# Altium PCB Shels_System_Bmduino.PcbDoc
Units mm, origin at the board's own origin, x right, y up, seen from the top; angles counter-clockwise.
Board outline 65.2 x 65.33 mm, 2 copper layers (Top Layer, Bottom Layer); 42 components, 32 nets, 184 pads, 27 vias.
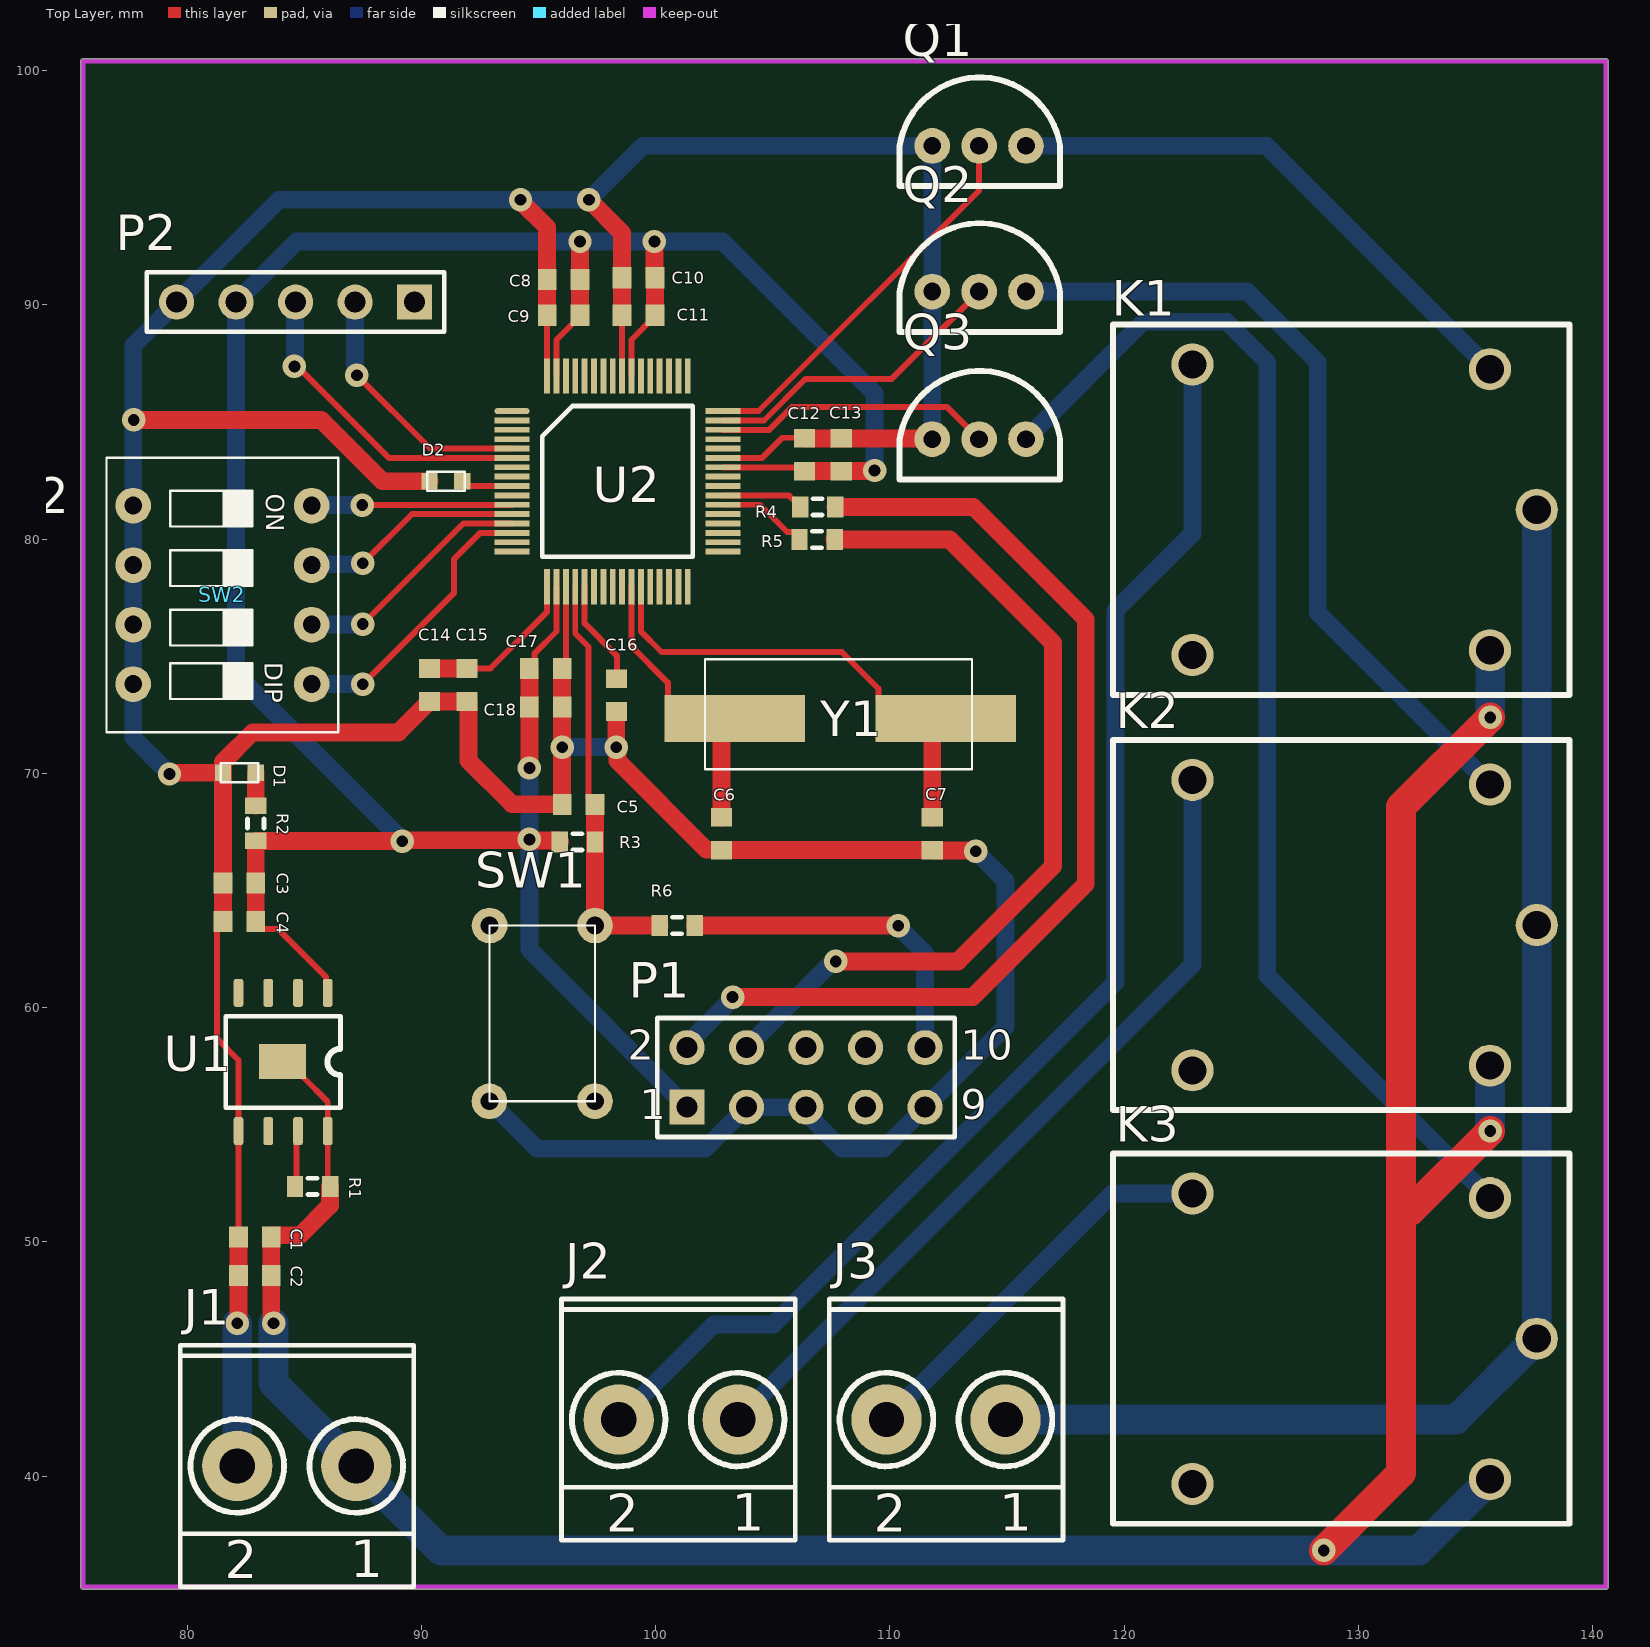
[diagram p0: Top Layer view]
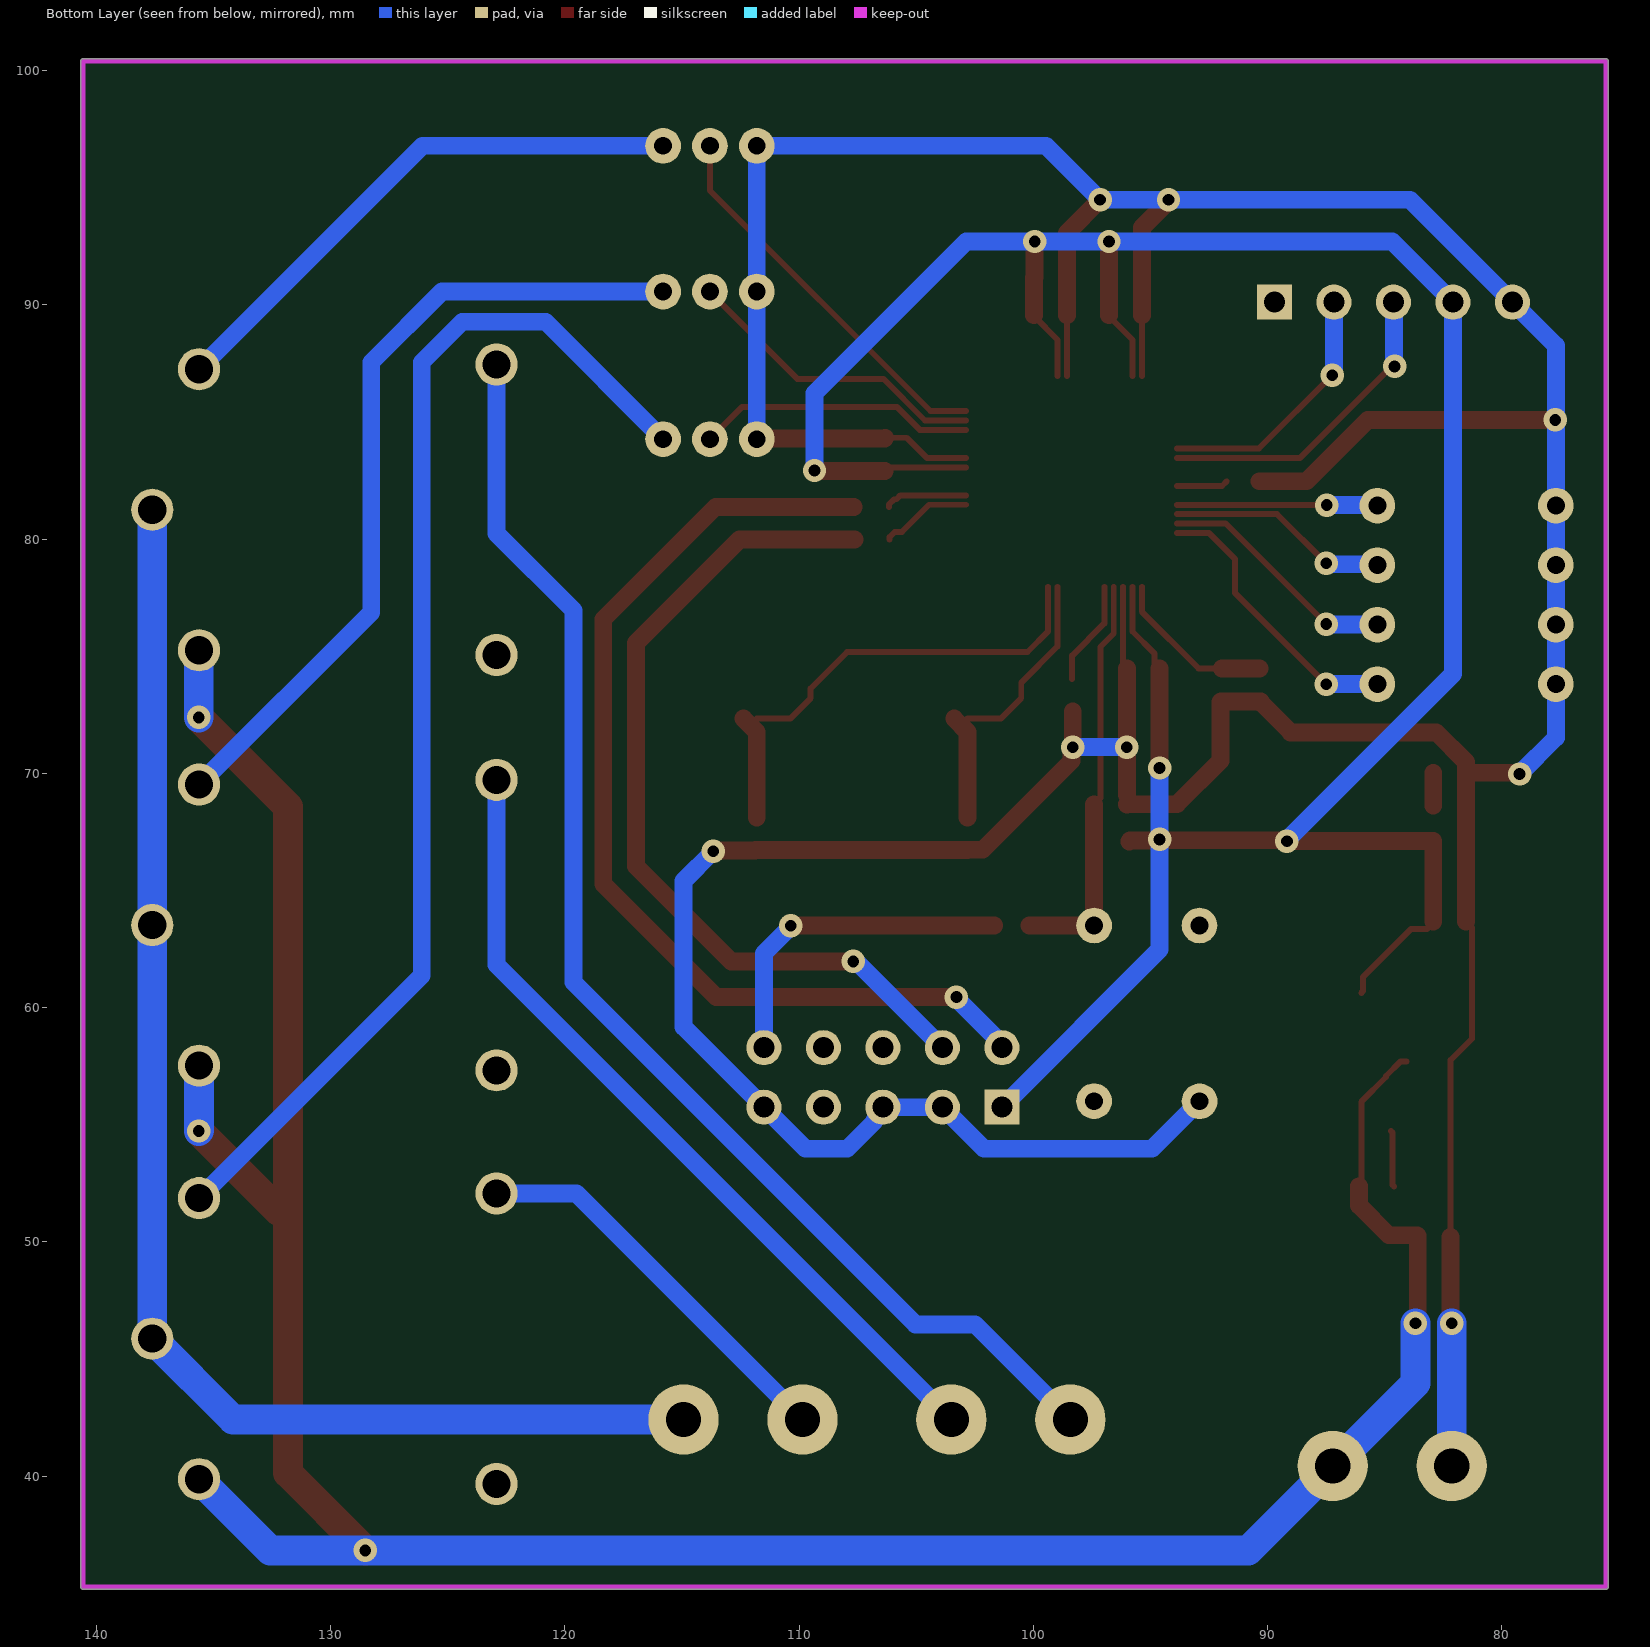
[diagram p1: Bottom Layer view, seen from below]

## Layer stack, top to bottom
Top Solder: solder mask 0.0102, Solder Resist, Dk 3.5
Top Layer: signal copper 0.0356
Dielectric 1: dielectric 0.32, FR-4, Dk 4.8
Bottom Layer: signal copper 0.0356
Bottom Solder: solder mask 0.0102, Solder Resist, Dk 3.5

## Board outline
75.465,35.278 75.465,98.424 75.465,100.405 cw(c75.565,100.405) 75.565,100.506 140.565,100.506 cw(c140.565,100.405) 140.665,100.405 140.665,97.132 140.665,35.278 cw(c140.565,35.278) 140.565,35.178 75.565,35.178 cw(c75.565,35.278)

## Design rules (kind name [scope] priority, off if disabled: settings)
Clearance [All] p1: gap=0.102 ignorepadtopadclearanceinfootprint=FALSE
PolygonConnect [All] p1: connectstyle=Relief reliefconductorwidth=0.254 reliefentries=4 polygonreliefangle="90 Angle" airgapwidth=0.254
RoutingVias [All] p1: holewidth=0.5 width=1 viastyle="Through Hole" minholewidth=0.5 minwidth=1 maxholewidth=0.5 maxwidth=1
SolderMaskExpansion [All] p1: expansion=0.102 istentingtop=FALSE
Width [All] p1: maxlimit=1.524 minlimit=0.178 preferedwidth=0.254 minimp=50.000000 maximp=50.000000 favimp=50.000000
30 further rules are at their usual default settings.

## Components (designator, comment, footprint, x,y, rotation, side; value= is the part's Value field where it differs from the comment)
C1 "Cap Semi" 1608[0603] 82.894,50.216 r0 top value=0.1uF
C2 "Cap Semi" 1608[0603] 82.894,48.565 r0 top value=10uF
C3 "Cap Semi" 1608[0603] 82.234,65.329 r0 top value=0.1uF
C4 "Cap Semi" 1608[0603] 82.234,63.678 r0 top value=10uF
C5 "Cap Semi" 1608[0603] 96.712,68.682 r0 top value=0.01uF
C6 "Cap Semi" 1608[0603] 102.811,67.426 r270 top value=12pF
C7 "Cap Semi" 1608[0603] 111.811,67.426 r90 top value=12pF
C8 "Cap Semi" 1608[0603] 96.071,91.084 r180 top value=2.2uF
C9 "Cap Semi" 1608[0603] 96.071,89.56 r0 top value=0.1uF
C10 "Cap Semi" 1608[0603] 99.271,91.161 r180 top value=2.2uF
C11 "Cap Semi" 1608[0603] 99.271,89.56 r0 top value=0.1uF
C12 "Cap Semi" 1608[0603] 106.35,83.606 r90 top value=2.2uF
C13 "Cap Semi" 1608[0603] 107.925,83.606 r270 top value=0.1uF
C14 "Cap Semi" 1608[0603] 90.348,73.776 r270 top value=2.2uF
C15 "Cap Semi" 1608[0603] 91.948,73.776 r90 top value=0.1uF
C16 "Cap Semi" 1608[0603] 98.323,73.341 r90 top value=0.1uF
C17 "Cap Semi" 1608[0603] 95.312,74.476 r0 top value=2.2uF
C18 "Cap Semi" 1608[0603] 95.312,72.844 r180 top value=0.1uF
D1 "green_light" LED_Green 82.934,70.028 r180 top
D2 "green_light" LED_Green 91.748,82.474 r180 top
J1 "Terminal_Block" "terminal block" 82.144,40.437 r270 top
J2 "Terminal_Block" "terminal block" 98.425,42.418 r270 top
J3 "Terminal_Block" "terminal block" 109.855,42.418 r270 top
K1 "Relay" Relay 128.829,80.952 r180 top
K2 "Relay" Relay 128.829,63.221 r180 top
K3 "Relay" Relay 128.829,45.565 r180 top
P1 "SW-DP" HDR2X5 101.346,55.753 r0 top
P2 "Wi-Fi_USART1" HDR1X5 89.713,90.119 r180 top
Q1 "S9013" S9013 113.814,96.792 r270 top
Q2 "S9013" S9013 113.814,90.569 r270 top
Q3 "S9013" S9013 113.814,84.268 r270 top
R1 "Res3" J1-0603 85.356,52.375 r180 top value=100
R2 "Res3" J1-0603 82.931,67.869 r90 top value=100
R3 "Res3" J1-0603 96.662,67.081 r0 top value=100
R4 "Res3" J1-0603 106.921,81.382 r180 top value=100
R5 "Res3" J1-0603 106.894,79.985 r180 top value=100
R6 "Res3" J1-0603 100.921,63.507 r180 top value=100
SW1 "BUTTON_DIP_4PIN" Push_Button 92.912,63.507 r270 top
SW2 "DIP_4_Switch" D_Switch_4 77.699,81.432 r270 top
U1 "HT7333-7" HT7333 86.549,59.633 r180 top
U2 "HT32F52367" HT32H52367 93.871,85.47 r0 top
Y1 "SMD_8MHz" Quartz-Crystal-8MHz 103.632,72.339 r0 top

## Footprints (in the part's own frame and the unit in brackets; to place one, negate y for a bottom-side part, rotate by r counter-clockwise, add the part's x,y. Pads: shape width x height; smd on the part's side, far side on the other; paste and mask are expansions set on the pad)
1608[0603] [mm] "Chip Capacitor, Body 1.6x0.8mm, IPC High Density"
  rect 0.8x0.9 smd: 1(-0.7,0) 2(0.7,0)
  body extent -0.87,-0.48 0.87,0.48, height 1.3
D_Switch_4 [mil] "DIP_Switch_4"
  round 60 hole 30: 1(0,300) 2(100,300) 3(200,300) 4(300,300) 5(0,0) 6(100,0) 7(200,0) 8(300,0)
  silkscreen extent -81,-45 381,345
HDR1X5 [mm] "Connector; Header; 5 Position"
  rect 1.5x1.5 hole 0.9: 1(0,0)
  round 1.5 hole 0.9: 2(2.54,0) 3(5.08,0) 4(7.62,0) 5(10.16,0)
  silkscreen extent -1.27,-1.27 11.43,1.27
HDR2X5 [mm] "Connector; Header; 5x2 Position"
  rect 1.5x1.5 hole 0.9: 1(0,0)
  round 1.5 hole 0.9: 2(0,2.54) 3(2.54,0) 4(2.54,2.54) 5(5.08,0) 6(5.08,2.54) 7(7.62,0) 8(7.62,2.54) 9(10.16,0) 10(10.16,2.54)
  silkscreen extent -1.27,-1.27 11.43,3.81
HT32H52367 [mm] "HT32H52367"
  oval 1.5x0.25 smd: 1(0,0)
  rect 1.5x0.25 smd: 2(0,-0.4) 3(0,-0.8) 4(0,-1.2) 5(0,-1.6) 6(0,-2) 7(0,-2.4) 8(0,-2.8) 9(0,-3.2) 10(0,-3.6) 11(0,-4) 12(0,-4.4) 13(0,-4.8) 14(0,-5.2) 15(0,-5.6) 16(0,-6) 33(9,-6) 34(9,-5.6) 35(9,-5.2) 36(9,-4.8) 37(9,-4.4) 38(9,-4) 39(9,-3.6) 40(9,-3.2) 41(9,-2.8) 42(9,-2.4) 43(9,-2) 44(9,-1.6) 45(9,-1.2) 46(9,-0.8) 47(9,-0.4) 48(9,0)
  rect 0.25x1.5 smd: 17(1.5,-7.5) 18(1.9,-7.5) 19(2.3,-7.5) 20(2.7,-7.5) 21(3.1,-7.5) 22(3.5,-7.5) 23(3.9,-7.5) 24(4.3,-7.5) 25(4.7,-7.5) 26(5.1,-7.5) 27(5.5,-7.5) 28(5.9,-7.5) 29(6.3,-7.5) 30(6.7,-7.5) 31(7.1,-7.5) 32(7.5,-7.5) 49(7.5,1.5) 50(7.1,1.5) 51(6.7,1.5) 52(6.3,1.5) 53(5.9,1.5) 54(5.5,1.5) 55(5.1,1.5) 56(4.7,1.5) 57(4.3,1.5) 58(3.9,1.5) 59(3.5,1.5) 60(3.1,1.5) 61(2.7,1.5) 62(2.3,1.5) 63(1.9,1.5) 64(1.5,1.5)
  silkscreen extent 1.28,-6.21 7.71,0.22
HT7333 [mm] "HT7333-7"
  rrect50% 0.41x1.2 smd: 1(0.545,-1) 2(1.815,-1) 3(3.085,-1) 4(4.355,-1) 5(4.355,4.902) 6(3.085,4.902) 7(1.815,4.902) 8(0.545,4.902)
  rect 2x1.5 smd: 9(2.475,1.925)
  silkscreen extent 0,0 4.9,3.9
J1-0603 [mm] "Chip Resistor, Body 1.6x0.8mm, IPC High Density"
  rect 0.7x0.9 smd: 1(-0.75,0) 2(0.75,0)
  silkscreen extent -0.2,-0.35 0.2,0.35, body extent -0.85,-0.48 0.85,0.48, height 0.9
LED_Green [mm] "LED_0603"
  rect 0.7x0.7 smd: 1(0,0) 2(1.4,0)
  silkscreen extent -0.1,-0.4 1.5,0.4
Push_Button [mil] "6*6"
  round 60 hole 30: 1(0,177.17) 2(0,0) 3(295.28,177.17) 4(295.37,-0.17)
  silkscreen extent 0,0 295,177
Quartz-Crystal-8MHz [mm] "Quartz-Crystal-8MHz"
  rect 6x2 smd: 1(-0.25,0) 2(8.75,0)
  silkscreen extent -1.52,-2.16 9.88,2.54
Relay [mm] "SRD05VDCSLC"
  round 1.8 hole 1.2: 0(-6.788,5.695) 1(-8.788,-0.305) 2(-6.788,-6.305) 3(5.912,5.895) 4(5.912,-6.505)
  silkscreen extent -10.19,-8.2 9.31,7.6
S9013 [mil] "S9013_TO-92"
  round 60 hole 30: 0(-0.08,-78.87) 1(-0.08,-0.13) 2(-0.08,78.61)
  silkscreen extent -115,-134 68,136
"terminal block" [mm]
  round 3 hole 1.5 paste+0 mask+0.051: 1(0,5.08) 2(0,0)
  silkscreen extent -5.15,-2.44 5.15,7.54

## Part data
C1 C2 C3 C4 C5 C6 C7 C8 C9 C10 C11 C12 C13 C14 C15 C16 C17 C18: "Capacitor (Semiconductor SIM Model)", LatestRevisionDate=29-May-2009, LatestRevisionNote="IPC-7351 Footprint Added.", PackageDescription="Chip Capacitor", PackageReference=C1206, Published=8-Jun-2000, Publisher="Altium Limited"
D1 D2: library part LED_Green
J1 J2 J3: library part "Terminal Block"
P1: library part "Header 5X2", "Header, 5-Pin, Dual row", LatestRevisionDate=17-Jul-2002, LatestRevisionNote="Re-released for DXP Platform.", Publisher="Altium Limited"
P2: library part "Header 5", "Header, 5-Pin", LatestRevisionDate=17-Jul-2002, LatestRevisionNote="Re-released for DXP Platform.", Publisher="Altium Limited"
R1 R2 R3 R4 R5 R6: "Resistor", LatestRevisionDate=29-May-2009, LatestRevisionNote="IPC-7351 Footprint Added.", PackageDescription="Chip Resistor", PackageReference=J1-0603, Published=8-Jun-2000, Publisher="Altium Limited"
SW1: library part Push_Button
SW2: library part Switch_D_4
U1: library part HT7333
Y1: library part Quartz_Crystal_8MHz

## Via types
v1: diameter 1, hole 0.5, Top Layer to Bottom Layer, 27 vias

## Nets (pads, with @x,y where several pads share a name; then routed paths per layer and width w, separated by ;. In a path a pad name is that pad's centre, name@x,y a point inside that pad or via, vN(x,y) a via of type N, cw(c..) or ccw(c..) an arc to the next point about the centre after c; other vN are vias at no path point)
3.3V: C3.2 C4.2 C8.1 C9.2 C10.1 C11.2 C12.1 C13.2 C17.1 C18.2 P1.1 P2.4 R2.1 R3.1 U1.1 U2.18 U2.42 U2.55 U2.63 | length 125.8
  Top Layer w0.254: C4.2 82.934,63.628 83.207,63.355 83.889,63.355 85.926,61.317 85.926,60.711 U1.1 ; C17.1 94.84,74.704 94.84,75.129 95.771,76.061 U2.18 ; U2.63 95.771,88.51 96.771,89.51 C9.2 ; U2.55 98.971,88.51 99.971,89.51 C11.2 ; U2.42 106.186,83.07 C12.1
  Top Layer w0.762: C4.2 C3.2 82.932,65.33 82.932,67.117 R2.1 89.179,67.119 89.205,67.145 94.577,67.145 v1(94.615,67.183) 94.661,67.137 95.881,67.137 95.912,67.106 R3.1 ; C17.1 C18.2 94.614,72.843 94.614,70.232 v1(94.615,70.231) ; C9.2 C8.1 96.773,91.086 96.773,92.709 v1(96.774,92.71) ; v1(99.949,92.71) 99.96,92.699 99.96,91.172 C10.1 C11.2 ; C12.1 C13.2 107.937,82.918 109.334,82.918 v1(109.347,82.931)
  Bottom Layer w0.762: v1(89.179,67.107) 89.179,67.158 82.093,74.244 P2.4 84.684,92.71 v1(99.949,92.71) 102.87,92.71 109.347,86.233 v1(109.347,82.931) ; v1(94.615,70.231) v1(94.615,67.183) 94.615,62.484 P1.1
5V: C1.2 C2.2 J1.1 K1.0 K2.0 K3.0 R1.1 U1.8 U1.9 | length 122.1
  Top Layer w0.254: U1.9 84.324,57.709 84.947,57.086 84.947,57.039 86.004,55.982 U1.8 86.004,52.476 R1.1
  Top Layer w0.762: v1(83.693,46.533) 83.693,46.597 83.594,46.696 C2.2 83.594,50.266 83.613,50.285 84.829,50.285 86.106,51.562 R1.1
  Top Layer w1.27: v1(128.524,36.83) 131.826,40.132 131.826,51.308 ; v1(135.636,54.737) 132.207,51.308 131.826,51.308 ; v1(135.636,72.39) 131.826,68.58 131.826,51.308
  Bottom Layer w1.27: v1(83.693,46.533) 83.693,43.967 90.83,36.83 v1(128.524,36.83) 132.577,36.83 K3.0 ; K2.0 135.617,54.756 v1(135.636,54.737) ; K1.0 135.636,75.238 v1(135.636,72.39)
24V: J3.1 K1.1 K2.1 K3.1 | length 59.5
  Bottom Layer w1.27: J3.1 134.165,42.418 K3.1 K2.1 K1.1
C1: K1.2 Q1.2 | length 23.8
  Bottom Layer w0.762: Q1.2 126.08,96.794 K1.2
C2: K2.2 Q2.2 | length 34.8
  Bottom Layer w0.762: Q2.2 125.253,90.571 128.27,87.554 128.27,76.873 K2.2
C3: K3.2 Q3.2 | length 52.7
  Bottom Layer w0.762: Q3.2 120.822,89.281 124.384,89.281 126.111,87.554 126.111,61.376 K3.2
CLDO: C14.1 C15.2 U2.17 | length 7.1
  Top Layer w0.254: C15.2 91.953,74.481 92.947,74.481 95.371,76.905 U2.17
  Top Layer w0.762: C14.1 C15.2
GND: C1.1 C2.1 C3.1 C4.1 C5.1 C6.2 C7.1 C8.2 C9.1 C10.2 C11.1 C12.2 C13.1 C14.2 C15.1 C16.1 C17.2 C18.1 D1.2 D2.2 J1.2 P1.3 P1.5 P1.9 P2.5 Q1.0 Q2.0 Q3.0 SW1.4 SW2.5 SW2.6 SW2.7 SW2.8 U1.5 U2.19 U2.43 U2.56 U2.64 | length 225.1
  Top Layer w0.254: C4.1 81.28,63.424 81.28,58.674 82.194,57.76 U1.5 C1.1 ; U2.64 C9.1 ; C17.2 96.171,74.635 U2.19 ; U2.56 C11.1 ; U2.43 104.552,83.47 105.413,84.331 C12.2@106.324,84.331
  Top Layer w0.762: v1(77.724,85.09) 85.725,85.09 88.341,82.474 D2.2 ; v1(79.248,69.977) 79.312,69.977 79.363,70.028 D1.2 ; C4.1 C3.1 D1.2 ; v1(82.144,46.533) 82.144,46.597 82.194,46.648 C1.1 ; v1(94.234,94.488) 94.234,94.438 95.371,93.301 C8.2 C9.1 ; C5.1 96.011,68.683 93.877,68.683 92.017,70.543 92.017,73.057 91.998,73.076 C15.1 90.298,73.076 90.279,73.057 90.279,73.014 89.02,71.755 82.804,71.755 81.534,70.485 D1.2 ; C5.1@96.012,69.081 v1(96.012,71.12) C18.1 C17.2 ; v1(97.155,94.488) 98.571,93.072 C10.2 C11.1 ; C16.1 v1(98.323,71.12) 98.369,71.074 98.369,70.541 102.165,66.745 102.792,66.745 C6.2 111.861,66.726 111.88,66.707 113.633,66.707 v1(113.665,66.675) ; C12.2@106.324,84.331 C12.2 Q3.0@111.775,84.306
  Bottom Layer w0.762: v1(79.248,69.977) 77.699,71.526 SW2.8 SW2.7 SW2.6 SW2.5 77.699,88.265 P2.5 83.922,94.488 v1(94.234,94.488) v1(97.155,94.488) 99.461,96.794 Q1.0 Q2.0 Q3.0 ; J1.2 J1.2@82.169,40.411 ; SW1.4 94.937,53.975 102.108,53.975 P1.3 P1.5 ; v1(96.012,71.12) 96.025,71.133 98.336,71.133 v1@98.349,71.145 ; P1.5@106.626,55.753 P1.5 ; v1(113.665,66.675) 114.935,65.405 114.935,59.182 P1.9 109.728,53.975 107.95,53.975 106.795,55.13 106.795,55.184 106.426,55.553 P1.5
  Bottom Layer w1.27: J1.2 v1(82.144,46.533)
GPIO_DIP1_PC4: SW2.1 U2.11 | length 8.6
  Top Layer w0.254: v1(87.478,81.458) 87.487,81.468 93.869,81.468 U2.11
  Bottom Layer w0.254: SW2.1 SW2.1@85.344,81.458
  Bottom Layer w0.762: SW2.1@85.344,81.458 v1(87.478,81.458)
GPIO_DIP2_PC5: SW2.2 U2.12 | length 9.5
  Top Layer w0.254: v1(87.503,78.969) 89.604,81.07 U2.12
  Bottom Layer w0.254: SW2.2 SW2.2@85.357,78.93 ; v1@87.465,78.93 v1(87.503,78.969)
  Bottom Layer w0.762: SW2.2@85.357,78.93 v1@87.465,78.93
GPIO_DIP3_PC8: SW2.3 U2.13 | length 10.3
  Top Layer w0.254: v1(87.503,76.378) 91.795,80.67 U2.13
  Bottom Layer w0.254: SW2.3 SW2.3@85.331,76.365 ; v1@87.49,76.365 v1(87.503,76.378)
  Bottom Layer w0.762: SW2.3@85.331,76.365 v1@87.49,76.365
GPIO_DIP4_PC9: SW2.4 U2.14 | length 12.1
  Top Layer w0.254: v1(87.503,73.812) 91.389,77.699 91.389,79.146 92.51,80.268 93.869,80.268 U2.14
  Bottom Layer w0.762: SW2.4 v1(87.503,73.812)
GPIO_GreenLED_PD1: Q3.1 U2.46 | length 11.9
  Top Layer w0.254: U2.46 104.852,84.67 105.832,85.649 112.432,85.649 Q3.1
GPIO_LED_PD4: D2.1 U2.9 | length 2.2
  Top Layer w0.254: D2.1 91.95,82.272 93.869,82.272 U2.9
GPIO_RedLED_PD3: Q1.1 U2.48 | length 16.7
  Top Layer w0.254: U2.48 104.393,85.47 113.811,94.888 Q1.1
GPIO_YellowLED_PD2: Q2.1 U2.47 | length 13.2
  Top Layer w0.254: U2.47 104.628,85.07 106.401,86.843 110.083,86.843 Q2.1
GreenLED: J3.2 K3.4 | length 17.1
  Bottom Layer w0.762: J3.2 119.507,52.07 K3.4
NetD1_1: D1.1 R2.2 | length 1.4
  Top Layer w0.762: R2.2 82.934,68.622 D1.1
NetP1_2: P1.2 R4.1 | length 44
  Top Layer w0.762: v1(103.286,60.452) 113.538,60.452 118.364,65.278 118.364,76.581 113.563,81.382 R4.1
  Bottom Layer w0.762: P1.2 101.346,58.448 103.286,60.388 v1(103.286,60.452)
NetP1_4: P1.4 R5.1 | length 37
  Top Layer w0.762: R5.1 112.547,79.985 116.967,75.565 116.967,66.04 112.903,61.976 v1(107.696,61.976)
  Bottom Layer w0.762: P1.4 107.523,61.93 107.65,61.93 v1(107.696,61.976)
NetP1_10: P1.10 R6.1 | length 14.4
  Top Layer w0.762: R6.1 101.674,63.504 110.359,63.504 v1(110.363,63.5)
  Bottom Layer w0.762: v1(110.363,63.5) 110.363,63.462 111.506,62.319 P1.10
nRST: C5.2 R3.2 R6.2 SW1.1 U2.20 | length 17.6
  Top Layer w0.254: U2.20 96.571,75.971 97.139,75.403 97.139,68.955 C5.2
  Top Layer w0.762: C5.2 R3.2 SW1.1 R6.2
RedLED: J2.2 K1.4 | length 56.7
  Bottom Layer w0.762: J2.2 102.489,46.482 105.029,46.482 119.634,61.087 119.634,76.962 122.917,80.245 K1.4
SWCLK_PA12: R5.2 U2.38 | length 3.9
  Top Layer w0.254: U2.38 104.458,81.47 105.62,80.308 105.921,80.308 106.144,80.085 R5.2
SWDIO_PA13: R4.2 U2.39 | length 3.6
  Top Layer w0.254: U2.39 105.683,81.87 105.848,81.705 105.948,81.705 106.171,81.482 R4.2
USART1_Rx_PA5: P2.3 U2.6 | length 13.7
  Top Layer w0.254: v1(84.582,87.376) 84.709,87.376 88.615,83.47 U2.6
  Bottom Layer w0.762: v1(84.582,87.376) 84.607,87.401 84.607,90.094 P2.3
USART1_Tx_PA4: P2.2 U2.5 | length 11.1
  Top Layer w0.254: v1(87.249,86.995) 90.374,83.87 U2.5
  Bottom Layer w0.762: P2.2 87.173,87.136 87.249,87.059 v1(87.249,86.995)
VBAT: C16.2 U2.21 | length 4.5
  Top Layer w0.254: U2.21 96.971,76.409 98.349,75.032 C16.2@98.349,74.041
VCE: R1.2 U1.7 | length 2.4
  Top Layer w0.254: R1.2 84.67,52.439 84.67,54.667 U1.7
XTALIN_PB13: C6.1 U2.26 Y1.1 | length 12.5
  Top Layer w0.254: U2.26 98.971,75.425 100.52,73.876 100.52,73.212 101.393,72.339 Y1.1@102.811,72.339
  Top Layer w0.762: C6.1 102.811,71.768 Y1.1
XTALOUT_PB14: C7.2 U2.27 Y1.2 | length 20.6
  Top Layer w0.254: U2.27 99.371,76.067 100.254,75.184 107.95,75.184 109.509,73.625 109.509,73.212 110.382,72.339 Y1.2@111.811,72.339
  Top Layer w0.762: C7.2 111.811,71.768 Y1.2
YellowLED: J2.1 K2.4 | length 35.3
  Bottom Layer w0.762: J2.1 122.917,61.83 K2.4
pads on no net: K1.3 K2.3 K3.3 P1.6 P1.7 P1.8 P2.1 SW1.2 SW1.3 U1.2 U1.3 U1.4 U1.6 U2.1 U2.2 U2.3 U2.4 U2.7 U2.8 U2.10 U2.15 U2.16 U2.22 U2.23 U2.24 U2.25 U2.28 U2.29 U2.30 U2.31 U2.32 U2.33 U2.34 U2.35 U2.36 U2.37 U2.40 U2.41 U2.44 U2.45 U2.49 U2.50 U2.51 U2.52 U2.53 U2.54 U2.57 U2.58 U2.59 U2.60 U2.61 U2.62

## Keep-outs
Keep-Out Layer:
  lines w0.2: 75.565,35.278 140.565,35.278 140.565,100.405 75.565,100.405 75.565,98.424 75.565,35.278

## Silkscreen, mask and mechanical layers (free items; w line width, h text height)
Mechanical 1:
  lines w0.254: 73.787,36.83 74.295,35.306 ; 73.787,98.933 74.295,100.457 ; 74.041,35.306 74.549,35.306 ; 74.041,100.457 74.549,100.457 ; 74.295,60.111 74.295,35.306 ; 74.295,75.652 74.295,100.457 ; 74.803,36.83 74.295,35.306 ; 74.803,98.933 74.295,100.457 ; 75.565,34.036 75.565,34.544 ; 77.089,33.782 75.565,34.29 ; 77.089,34.798 75.565,34.29 ; 100.053,34.29 75.565,34.29 ; 116.101,34.29 140.589,34.29 ; 139.065,33.782 140.589,34.29 ; 139.065,34.798 140.589,34.29 ; 140.589,34.036 140.589,34.544
  text "65.151 (mm)" at 75.209,60.365 h1.52 r90
  text "65.024 (mm)" at 100.307,33.376 h1.52

## Text inside footprints (layer, text, board x,y; h text height)
J1: Top Overlay "2" at 81.61,35.636 h1.6; Top Overlay "1" at 86.97,35.687 h1.6
J2: Top Overlay "2" at 97.892,37.617 h1.6; Top Overlay "1" at 103.251,37.668 h1.6
J3: Top Overlay "2" at 109.322,37.617 h1.6; Top Overlay "1" at 114.681,37.668 h1.6
P1: Top Overlay "10" at 113.03,57.785 h1.27; Top Overlay "9" at 113.03,55.245 h1.27; Top Overlay "1" at 99.314,55.245 h1.27; Top Overlay "2" at 98.806,57.785 h1.27
SW2: Top Overlay "ON" at 83.388,81.94 h0.76 r270; Top Overlay "DIP" at 83.312,74.752 h0.76 r270